# EAGLE board 8-electrovalvulas_V3 (EAGLE 6.4)
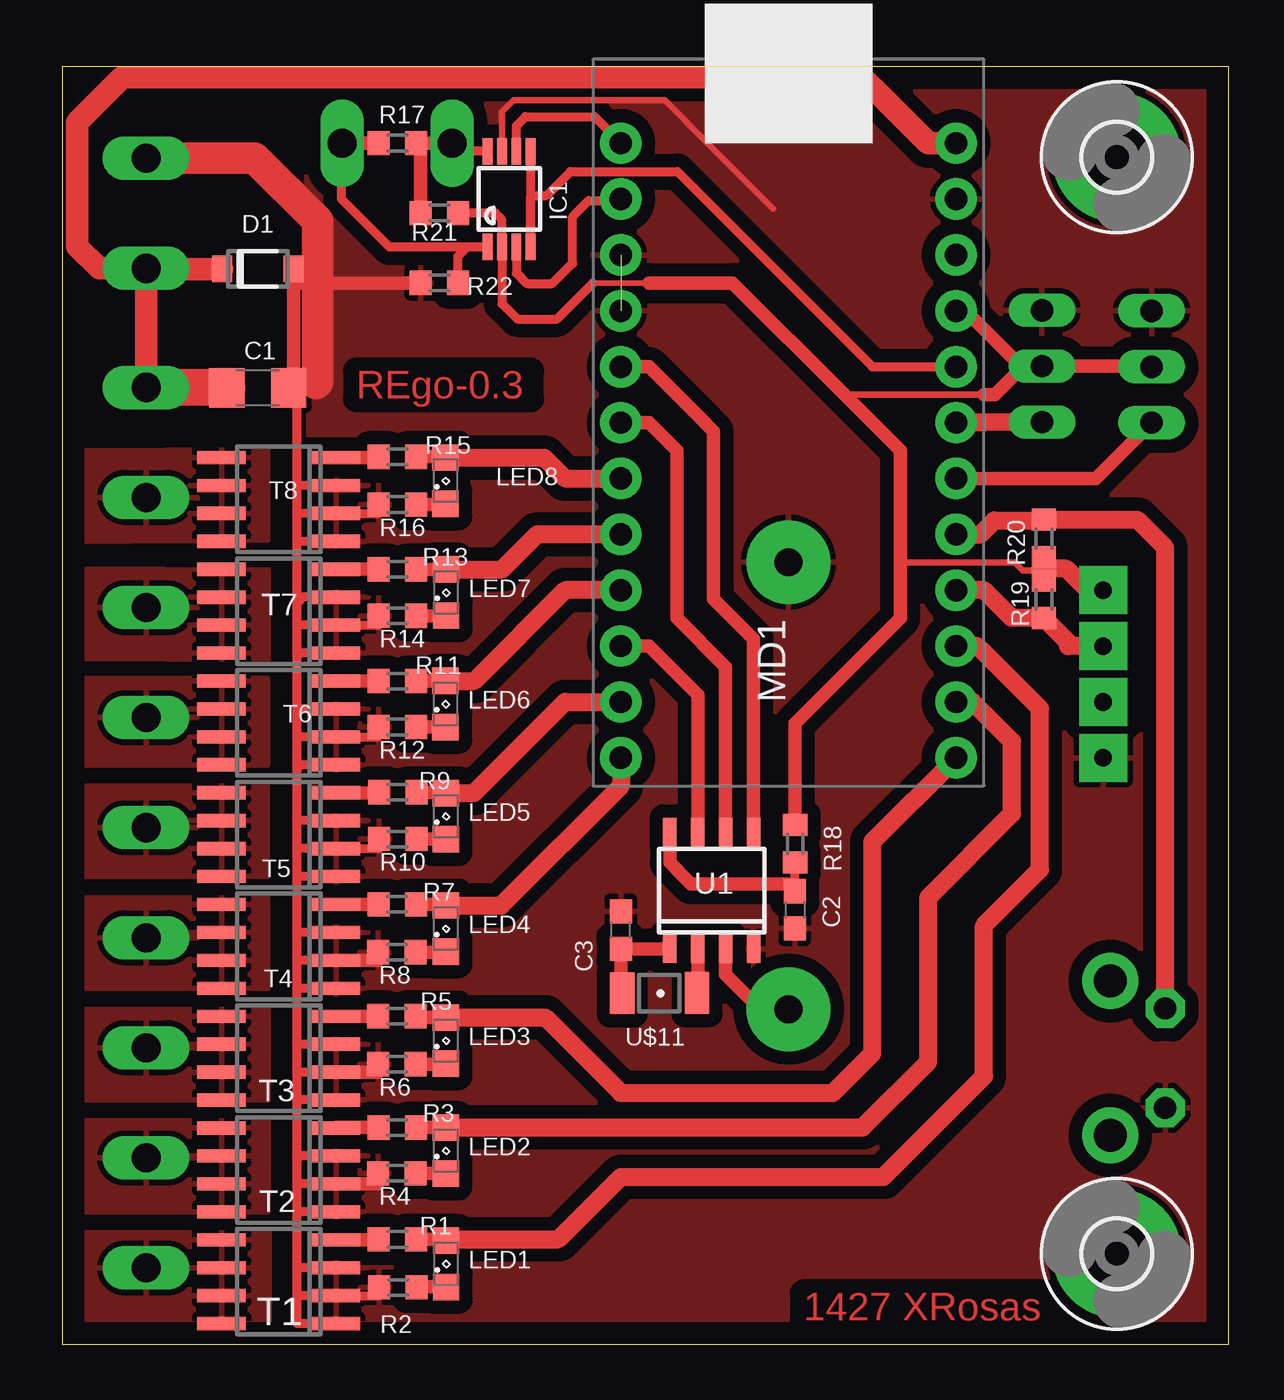
[diagram p0: board, top side]
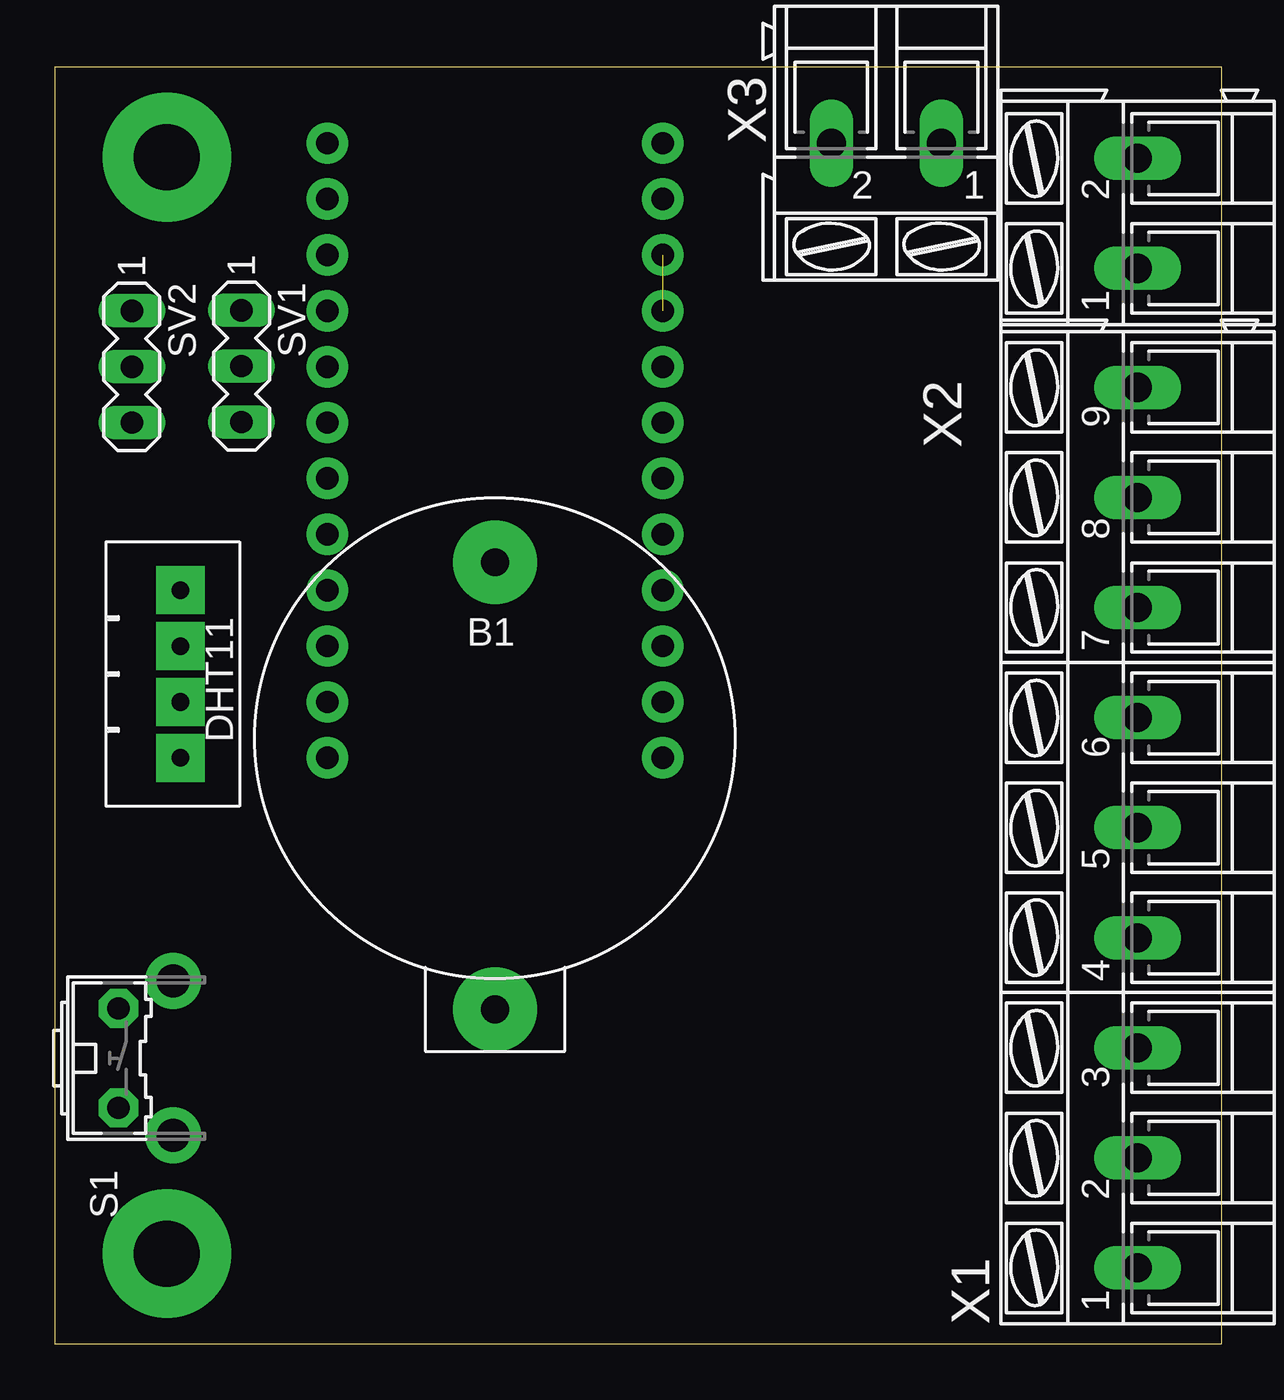
[diagram p1: board, bottom side, seen from below]

Size 53.01 x 58.09 mm. Coordinates in mm from the lower left corner, seen from the top.
Outline: 53.01,0 53.01,58.09 0,58.09 0,0 53.01,0
Copper layers (1*16): Top 0.035mm / dielectric 1.5mm / Bottom 0.035mm
Design rules "default": minimum track width 10mil, minimum drill 24mil, track to track 8mil, track to pad 8mil, pad to pad 8mil, via to via 8mil, smd to smd 8mil, copper to edge 40mil, drill to drill 8mil, minimum pad ring 10mil, minimum via ring 8mil, stop-mask expansion 4mil, vias tented up to drill 0mil, thermal gap 10mil

## Footprints (pad centres in the part's own frame; a part is rotated, then mirrored left to right if it is on the bottom)
BATTERY_1236_C = drill 1.27 pad 3.81: + 0,0; - 0,20.32
C1206 = smd 1.6 x 1.8: 1 -1.4,0; 2 1.4,0
C0603 = smd 1.1 x 1: 1 -0.85,0; 2 0.85,0
SOD123FL = smd 0.91 x 1.22: A 1.625,0; C -1.625,0
3,0-PAD = drill 3 pad 5.842: B3,0 0,0
UMAX8 = smd 0.45 x 1.2: 1 -0.975,-2.175; 2 -0.325,-2.175; 3 0.325,-2.175; 4 0.975,-2.175; 5 0.975,2.175; 6 0.325,2.175; 7 -0.325,2.175; 8 -0.975,2.175
DHT11-PION. = drill 0.8 pad 2.184 square: DATA -1.27,0.305; GND 3.81,0.305; NC 1.27,0.305; VCC -3.81,0.305
SML0805 = smd 1.2 x 1.2: A 1.05,0; C -1.05,0
PRO_MICRO = drill 1.016 pad 1.88: 1 -7.62,11.43; 2 -7.62,8.89; 3 -7.62,6.35; 4 -7.62,3.81; 5 -7.62,1.27; 6 -7.62,-1.27; 7 -7.62,-3.81; 8 -7.62,-6.35; 9 -7.62,-8.89; 10 -7.62,-11.43; 11 -7.62,-13.97; 12 -7.62,-16.51; 13 7.62,-16.51; 14 7.62,-13.97; 15 7.62,-11.43; 16 7.62,-8.89; 17 7.62,-6.35; 18 7.62,-3.81; 19 7.62,-1.27; 20 7.62,1.27; 21 7.62,3.81; 22 7.62,6.35; 23 7.62,8.89; 24 7.62,11.43
R0603 = smd 1 x 1.1: 1 -0.85,0; 2 0.85,0
B3F-31XX = drill 1.016 pad 1.778 octagon: 1 -2.261,-1.245; 2 2.261,-1.245 | drill 1.499 pad 2.54: 3 -3.505,1.245; 4 3.505,1.245
MA03-1 = drill 1.016 long: 1 -2.54,0; 2 0,0; 3 2.54,0
SO-08 = smd 0.6 x 2.2: 1 -1.905,-2.6; 2 -0.635,-2.6; 3 0.635,-2.6; 4 1.905,-2.6; 5 1.905,2.6; 6 0.635,2.6; 7 -0.635,2.6; 8 -1.905,2.6
SOT96-1 = smd 0.6 x 1.3: 1 -1.905,-2.65; 2 -0.635,-2.65; 3 0.635,-2.65; 4 1.905,-2.65; 5 1.905,2.65; 6 0.635,2.65; 7 -0.635,2.65; 8 -1.905,2.65
T1A = smd 1.1 x 1.9: 1 -0.85,0; 2 2.551,0.004
AK300/9 = drill 1.321 long: 1 -20.015,0; 2 -15.011,0; 3 -10.008,0; 4 -5.004,0; 5 0,0; 6 5.004,0; 7 10.008,0; 8 15.011,0; 9 20.015,0
AK300/2 = drill 1.321 long: 1 -2.515,0; 2 2.489,0

## Placement (x,y rotation side)
B1  CR2032LF  [BATTERY_1236_C]  33.01,15.24 0 bottom
C1  100nF  [C1206]  8.88,43.5 0 top
C2  100nF  [C0603]  33.29,19.76 270 top
C3  15pF  [C0603]  25.39,18.84 90 top
D1  SMF5.0AT1  [SOD123FL]  8.88,48.89 0 top
H3  MOUNT-PAD-ROUND3.0  [3,0-PAD]  47.93,53.97 90 top
H4  MOUNT-PAD-ROUND3.0  [3,0-PAD]  47.93,4.13 90 top
IC1  MAX481CUA  [UMAX8]  20.31,52.07 0 top
IC10  DHT11-PION.  [DHT11-PION.]  47.62,30.48 270 bottom
LED1  [SML0805]  17.44,3.67 90 top
LED2  [SML0805]  17.43,8.81 90 top
LED3  [SML0805]  17.43,13.82 90 top
LED4  [SML0805]  17.43,18.91 90 top
LED5  [SML0805]  17.43,24.02 90 top
LED6  [SML0805]  17.41,29.12 90 top
LED7  [SML0805]  17.44,34.19 90 top
LED8  [SML0805]  17.41,39.27 90 top
MD1  Arduino Pro Micro  [PRO_MICRO]  33.01,43.18 0 top
R1  10K  [R0603]  15.23,4.78 180 top
R2  1K  [R0603]  15.26,2.6 180 top
R3  [R0603]  15.22,9.86 180 top
R4  [R0603]  15.21,7.79 180 top
R5  [R0603]  15.21,14.93 180 top
R6  [R0603]  15.21,12.74 180 top
R7  [R0603]  15.22,20.01 180 top
R8  [R0603]  15.21,17.84 180 top
R9  [R0603]  15.24,25.1 180 top
R10  [R0603]  15.24,22.98 180 top
R11  [R0603]  15.23,30.16 180 top
R12  [R0603]  15.22,28.07 180 top
R13  [R0603]  15.23,35.24 180 top
R14  [R0603]  15.23,33.12 180 top
R15  [R0603]  15.23,40.35 180 top
R16  [R0603]  15.23,38.18 180 top
R17  120  [R0603]  15.23,54.61 0 top
R18  100  [R0603]  33.31,22.76 90 top
R19  10K  [R0603]  44.62,33.88 270 top
R20  10K  [R0603]  44.62,36.64 90 top
R21  1k5  [R0603]  17.13,51.43 0 top
R22  1k5  [R0603]  17.13,48.26 180 top
S1  852/5  [B3F-31XX]  48.89,13.02 270 bottom
SV1  [MA03-1]  44.53,44.47 270 bottom
SV2  [MA03-1]  49.52,44.45 270 bottom
T1  Si4134DY  [SO-08]  9.83,2.86 90 top
T2  Si4134DY  [SO-08]  9.83,7.94 90 top
T3  Si4134DY  [SO-08]  9.83,13.02 90 top
T4  Si4134DY  [SO-08]  9.83,18.1 90 top
T5  Si4134DY  [SO-08]  9.83,23.18 90 top
T6  Si4134DY  [SO-08]  9.83,28.26 90 top
T7  Si4134DY  [SO-08]  9.83,33.34 90 top
T8  Si4134DY  [SO-08]  9.83,38.42 90 top
U1  PCF8523T  [SOT96-1]  29.52,20.64 0 top
U$11  CC5V-T1A  [T1A]  28,15.98 180 top
X1  [AK300/9]  3.8,23.5 90 bottom
X2  [AK300/2]  3.8,51.43 90 bottom
X3  [AK300/2]  15.23,54.61 180 bottom

## Library data of the parts
B1 = Itead_BP_110825.lbr
C1-C3 R1-R22 = rcl
D1 = diode
H3 H4 = holes
IC1 = maxim; MPN: MAX481CUA+; OC_FARNELL: unknown; OC_NEWARK: 71P2381
IC10 = DHT11
LED1-LED8 = led
MD1 = Arduino_pro_micro
S1 = adafruit
SV1 SV2 = con-lstb; OC_FARNELL: unknown; OC_NEWARK: unknown
T1-T8 = transistor-power
U1 = nxp_60_1_1
U$11 = crystal
X1-X3 = con-ptr500; OC_FARNELL: unknown; OC_NEWARK: unknown

## Nets
+12V: C1.1 D1.C MD1.24 X1.9 X2.1
A: IC1.8 R17.2 R21.1 X3.2
B: IC1.1 R17.1 R22.1 X3.1
C1: LED1.A MD1.15 R1.1
C2: LED2.A MD1.14 R3.1
C3: LED3.A MD1.13 R5.1
C4: LED4.A MD1.12 R7.1
C5: LED5.A MD1.11 R9.1
C6: LED6.A MD1.9 R11.1
C7: LED7.A MD1.8 R13.1
C8: LED8.A MD1.7 R15.1
DH: IC10.DATA MD1.16 R19.2
E1: T1.5 T1.6 T1.7 T1.8 X1.1
E2: T2.5 T2.6 T2.7 T2.8 X1.2
E3: T3.5 T3.6 T3.7 T3.8 X1.3
E4: T4.5 T4.6 T4.7 T4.8 X1.4
E5: T5.5 T5.6 T5.7 T5.8 X1.5
E6: T6.5 T6.6 T6.7 T6.8 X1.6
E7: T7.5 T7.6 T7.7 T7.8 X1.7
E8: T8.5 T8.6 T8.7 T8.8 X1.8
GND: B1.- C1.2 C2.2 C3.2 D1.A H3.B3,0 H4.B3,0 IC1.7 IC10.GND MD1.3 MD1.4 MD1.23 R2.2 R4.2 R6.2 R8.2 R10.2 R12.2 R14.2 R16.2 R22.2 S1.2 SV1.1 SV2.1 T1.1 T1.2 T1.3 T2.1 T2.2 T2.3 T3.1 T3.2 T3.3 T4.1 T4.2 T4.3 T5.1 T5.2 T5.3 T6.1 T6.2 T6.3 T7.1 T7.2 T7.3 T8.1 T8.2 T8.3 U1.4 X2.2
IN1: MD1.19 SV1.3
IN2: MD1.18 SV2.3
INT4: MD1.10 U1.7
N$1: R1.2 T1.4
N$3: LED1.C R2.1
N$5: R3.2 T2.4
N$6: C2.1 R18.1 U1.8
N$7: LED2.C R4.1
N$8: R5.2 T3.4
N$10: LED3.C R6.1
N$11: R7.2 T4.4
N$12: R9.2 T5.4
N$13: LED4.C R8.1
N$15: LED5.C R10.1
N$16: R11.2 T6.4
N$18: LED6.C R12.1
N$19: R13.2 T7.4
N$21: LED7.C R14.1
N$22: R15.2 T8.4
N$24: LED8.C R16.1
RX: IC1.3 MD1.2
SCL: MD1.6 U1.6
SDA: MD1.5 U1.5
SW: MD1.17 R20.2 S1.1
T/R: IC1.4 IC1.5 MD1.20
TX: IC1.6 MD1.1
VBAT: B1.+ U1.3
VCC: IC1.2 IC10.VCC MD1.21 R18.2 R19.1 R20.1 R21.2 SV1.2 SV2.2
X1: C3.1 U1.1 U$11.2
X2: U1.2 U$11.1

## Tracks (layer width: path | path; a pad name or v marks a point on that pad's centre or on a via)
+12V
  Top 1.016: D1.C 3.8,48.89 | 3.8,48.89 X2.1 1.67,48.93 0.68,49.92 0.68,55.57 2.72,57.6 36.34,57.6 36.8,57.15 36.82,57.15 39.36,54.61 MD1.24 | 3.8,48.89 X1.9
  Top 1.676: C1.1 3.8,43.5 X1.9
A
  Top 0.406: IC1.8 18.08,54.24 X3.2 | 16.29,54.4 R17.2
  Top 0.61: X3.2 R17.2 15.87,54.39 | R21.1 16.29,54.4
B
  Top 0.406: IC1.1 18.4,49.89 | 18.4,49.89 14.87,49.89 12.69,52.07 12.69,54.58 X3.1 | R22.1 17.98,49.47 18.4,49.89
  Top 0.61: R17.1 X3.1
C1
  Top 0.406: 17.38,4.78 LED1.A
  Top 0.61: R1.1 17.38,4.78
  Top 0.813: MD1.15 41.6,31.75 44.44,28.91 44.44,21.59 41.9,19.05 41.9,12.2 37.32,7.62 25.39,7.62 22.55,4.78 17.38,4.78
C2
  Top 0.61: R3.1 LED2.A
  Top 0.813: LED2.A 36.38,9.86 39.36,12.85 39.36,20.32 43.17,24.13 43.17,27.41 41.37,29.21 MD1.14
C3
  Top 0.406: 16.12,14.87 R5.1
  Top 0.61: LED3.A 16.12,14.87
  Top 0.813: LED3.A 21.95,14.87 25.39,11.43 35.02,11.43 36.82,13.23 36.82,22.86 MD1.13
C4
  Top 0.406: 17.38,20.01 LED4.A
  Top 0.61: R7.1 17.38,20.01
  Top 0.813: MD1.12 25.39,25.4 19.95,19.96 LED4.A
C5
  Top 0.406: 17.39,25.1 LED5.A
  Top 0.61: R9.1 17.39,25.1
  Top 0.813: LED5.A 18.7,25.07 22.85,29.21 MD1.11
C6
  Top 0.406: 17.4,30.16 LED6.A
  Top 0.61: R11.1 17.4,30.16
  Top 0.813: LED6.A 18.73,30.17 22.85,34.29 MD1.9
C7
  Top 0.61: R13.1 LED7.A
  Top 0.813: MD1.8 21.58,36.83 19.99,35.24 LED7.A
C8
  Top 0.406: 17.38,40.35 LED8.A
  Top 0.61: R15.1 17.38,40.35
  Top 0.813: LED8.A 21.9,40.32 22.85,39.37 MD1.7
DH
  Top 0.813: MD1.16 41.89,34.29 43.16,33.03 R19.2 45.71,31.93 45.71,31.75 IC10.DATA
E1
  pour Top: 9.41,5.08 9.41,-0.95 -0.01,-0.95 -0.01,5.08
E2
  pour Top: 9.35,10.16 9.35,6.03 -0.01,6.03 -0.01,10.16
E3
  pour Top: 9.35,15.24 9.35,11.11 -0.01,11.11 -0.01,15.24
E4
  pour Top: 9.33,20.3 9.33,16.17 -0.01,16.19 -0.01,20.32
E5
  pour Top: 9.29,25.4 9.29,21.27 -0.01,21.27 -0.01,25.4
E6
  pour Top: 9.33,30.27 9.33,26.35 -0.01,26.35 -0.01,30.27
E7
  pour Top: 9.35,35.22 9.36,31.15 0,31.18 -0.01,35.24
E8
  pour Top: 9.33,40.69 9.33,36.56 -0.01,36.51 -0.01,40.64
GND  (1 unrouted)
  Top 0.305: IC1.7 19.98,56.05 20.5,56.57 27.4,56.57 28.35,55.62 28.35,55.59 32.3,51.64
  Top 0.406: 10.68,2.22 T1.2 14.4,2.22 R2.2 | 10.68,2.22 10.68,3.49 | 10.68,3.49 10.68,6.03 | 10.68,6.03 10.68,7.3 | 10.68,7.3 10.68,8.57 | 10.68,8.57 10.68,11.11 | 10.68,11.11 10.68,12.38 | 10.68,12.38 10.68,13.65 | 10.68,13.65 10.68,16.19 | 10.68,16.19 10.68,17.46 | 10.68,17.46 10.68,18.73 | 10.68,18.73 10.68,21.27 | 10.68,21.27 10.68,22.54 | 10.68,22.54 10.68,23.81 | 10.68,23.81 10.68,26.35 | 10.68,26.35 10.68,27.62 | 10.68,27.62 10.68,28.89 | 10.68,28.89 10.68,31.43 | 10.68,31.43 10.68,32.7 | 10.68,32.7 10.68,33.97 | 10.68,33.97 10.68,36.51 | 10.68,36.51 10.68,37.78 | 10.68,37.78 10.68,39.05 | 10.68,39.05 10.68,43.5 | 10.51,43.5 10.68,43.5 | T8.1 10.68,36.51 | 10.68,33.97 T7.3 10.8,33.97 10.8,33.82 | 10.7,31.29 10.7,31.43 T7.1 10.68,31.43 | T6.3 10.68,28.89 | R12.2 14.37,27.62 T6.2 10.68,27.62 | 10.75,26.24 10.75,26.35 T6.1 10.68,26.35 | T5.3 10.68,23.81 | R10.2 14.39,22.54 T5.2 10.68,22.54 | T4.1 10.68,16.19 | T3.1 10.68,11.11 | 10.68,8.57 T2.3 10.78,8.57 10.78,8.52 | 10.68,37.78 T8.2 14.38,37.78 R16.2 | T8.3 10.68,39.05 | 10.68,32.7 T7.2 14.38,32.7 R14.2 | T5.1 10.68,21.27 | T4.3 10.68,18.73 | T4.2 10.68,17.46 | T3.3 10.68,13.65 | T3.2 10.68,12.38 | T2.2 10.68,7.3 | T2.1 10.68,6.03 | T1.1 10.68,0.95 10.68,2.22 | T1.3 10.68,3.49 | 10.68,43.5 11.53,43.5 11.53,43.68
  Top 0.61: T2.2 14.36,7.3 R4.2 | T3.2 14.36,12.38 R6.2 | T4.2 14.36,17.46 R8.2 | C1.2 10.51,43.5 10.51,48.26 | 10.51,48.26 D1.A | R22.2 10.51,48.26
  Top 1.422: X2.2 8.75,53.92 11.59,51.08 11.59,43.74 11.53,43.68
  pour Top (isolate 0.61): 11.51,-0.27 11.06,58.34 55.55,59.05 54.92,-0.32
IN1
  Top 0.813: SV1.3 43.15,41.93 41.9,41.91 MD1.19
IN2
  Top 0.61: MD1.18 46.98,39.37 SV2.3
INT4
  Top 0.61: U1.7 28.88,29.53 26.66,31.75 MD1.10
N$1
  Top 0.406: 14.36,4.76 R1.2
  Top 0.61: T1.4 14.36,4.76
N$3
  Top 0.406: 16.13,2.62 R2.1
  Top 0.61: LED1.C 16.13,2.62
N$5
  Top 0.406: 12.45,9.86 T2.4
  Top 0.61: R3.2 12.45,9.86
N$6
  Top 0.406: C2.1 R18.1
  Top 0.61: U1.8 27.61,21.91 27.93,21.59 27.93,21.58 28.58,20.93 32.97,20.93 C2.1
N$7
  Top 0.406: 17.4,7.79 LED2.C
  Top 0.61: R4.1 17.4,7.79
N$8
  Top 0.406: 14.35,14.92 R5.2
  Top 0.61: T3.4 14.35,14.92
N$10
  Top 0.406: 17.4,12.74 LED3.C
  Top 0.61: R6.1 17.4,12.74
N$11
  Top 0.406: R7.2
  Top 0.61: T4.4 R7.2
N$12
  Top 0.406: 14.37,25.08 R9.2
  Top 0.61: T5.4 14.37,25.08
N$13
  Top 0.406: 17.4,17.84 LED4.C
  Top 0.61: R8.1 17.4,17.84
N$15
  Top 0.406: 17.41,22.98 LED5.C
  Top 0.61: R10.1 17.41,22.98
N$16
  Top 0.406: R11.2
  Top 0.61: T6.4 R11.2
N$18
  Top 0.61: R12.1 LED6.C
N$19
  Top 0.406: R13.2
  Top 0.61: T7.4 R13.2
N$21
  Top 0.406: 17.43,33.12 LED7.C
  Top 0.61: R14.1 17.43,33.12
N$22
  Top 0.406: 14.35,40.32 R15.2
  Top 0.61: T8.4 14.35,40.32
N$24
  Top 0.406: 17.38,38.18 LED8.C
  Top 0.61: R16.1 17.38,38.18
RX
  Top 0.406: IC1.3 20.63,48.7 21.1,48.23 22.26,48.23 23.19,49.15 23.19,51.27 23.93,52 25.32,52 MD1.2
SCL
  Top 0.61: U1.6 30.15,30.8 27.93,33.02 27.93,40.64 26.66,41.91 MD1.6
SDA
  Top 0.61: U1.5 31.42,32.07 29.6,33.89 29.6,41.49 29.2,41.89 29.2,41.91 26.66,44.45 MD1.5
SW
  Top 0.813: S1.1 50.13,36.22 48.86,37.49 R20.2 44.59,37.47 42.37,37.47 41.73,36.83 MD1.17
T/R
  Top 0.406: IC1.5 IC1.4 21.29,52.21 21.3,52.23 22,52.23 23.09,53.32 27.95,53.32 36.82,44.45 MD1.20
TX
  Top 0.406: IC1.6 20.63,55.4 21.05,55.82 24.18,55.82 MD1.1
VBAT
  Top 0.61: U1.3 30.15,16.83 31.74,15.24 B1.+
VCC
  Top 0.254: 24.12,48.26 26.66,48.26
  Top 0.305: R19.1 44.53,34.73 | 38.09,35.55 43.3,35.55 43.66,35.19 44.55,35.19 44.62,35.25 | 35.55,43.18 41.9,43.18
  Top 0.406: R21.2 19.67,51.43 19.98,51.12 IC1.2 19.98,47.31 20.68,46.62 22.48,46.62 24.12,48.26
  Top 0.61: R18.2 33.31,28.24 38.09,33.02 38.09,35.55 38.09,40.64 36.82,41.91 35.55,43.18 30.47,48.26 26.66,48.26 | SV2.2 49.5,44.47 SV1.2 43.68,44.47 | MD1.21 41.05,46.99 43.58,44.47 43.68,44.47 | 41.9,43.18 42.39,43.18 43.68,44.47
  Top 0.813: IC10.VCC 46.61,34.29 45.63,35.27 44.65,35.27 44.64,35.28 | 44.64,35.28 44.64,35.77 R20.1 | R19.1 44.62,35.25 44.64,35.28
X1
  Top 0.406: 25.39,16.03 U$11.2
  Top 0.61: C3.1 25.39,16.03 | U1.1 C3.1 | C3.1
X2
  Top 0.406: 28.88,16.01 U$11.1
  Top 0.61: U1.2 28.88,16.01

## Text on the board
Top: REgo-0.3 | 1427 XRosas